# Altium PCB PCB2(ITERATION).PcbDoc
Units mil, origin at the board's own origin, x right, y up, seen from the top; angles counter-clockwise.
Board outline 7095 x 5260 mil, 4 copper layers (POWER, PGND, LOW POWER, SIGNAL/SGND); 86 components, 41 nets, 253 pads, 8 vias.
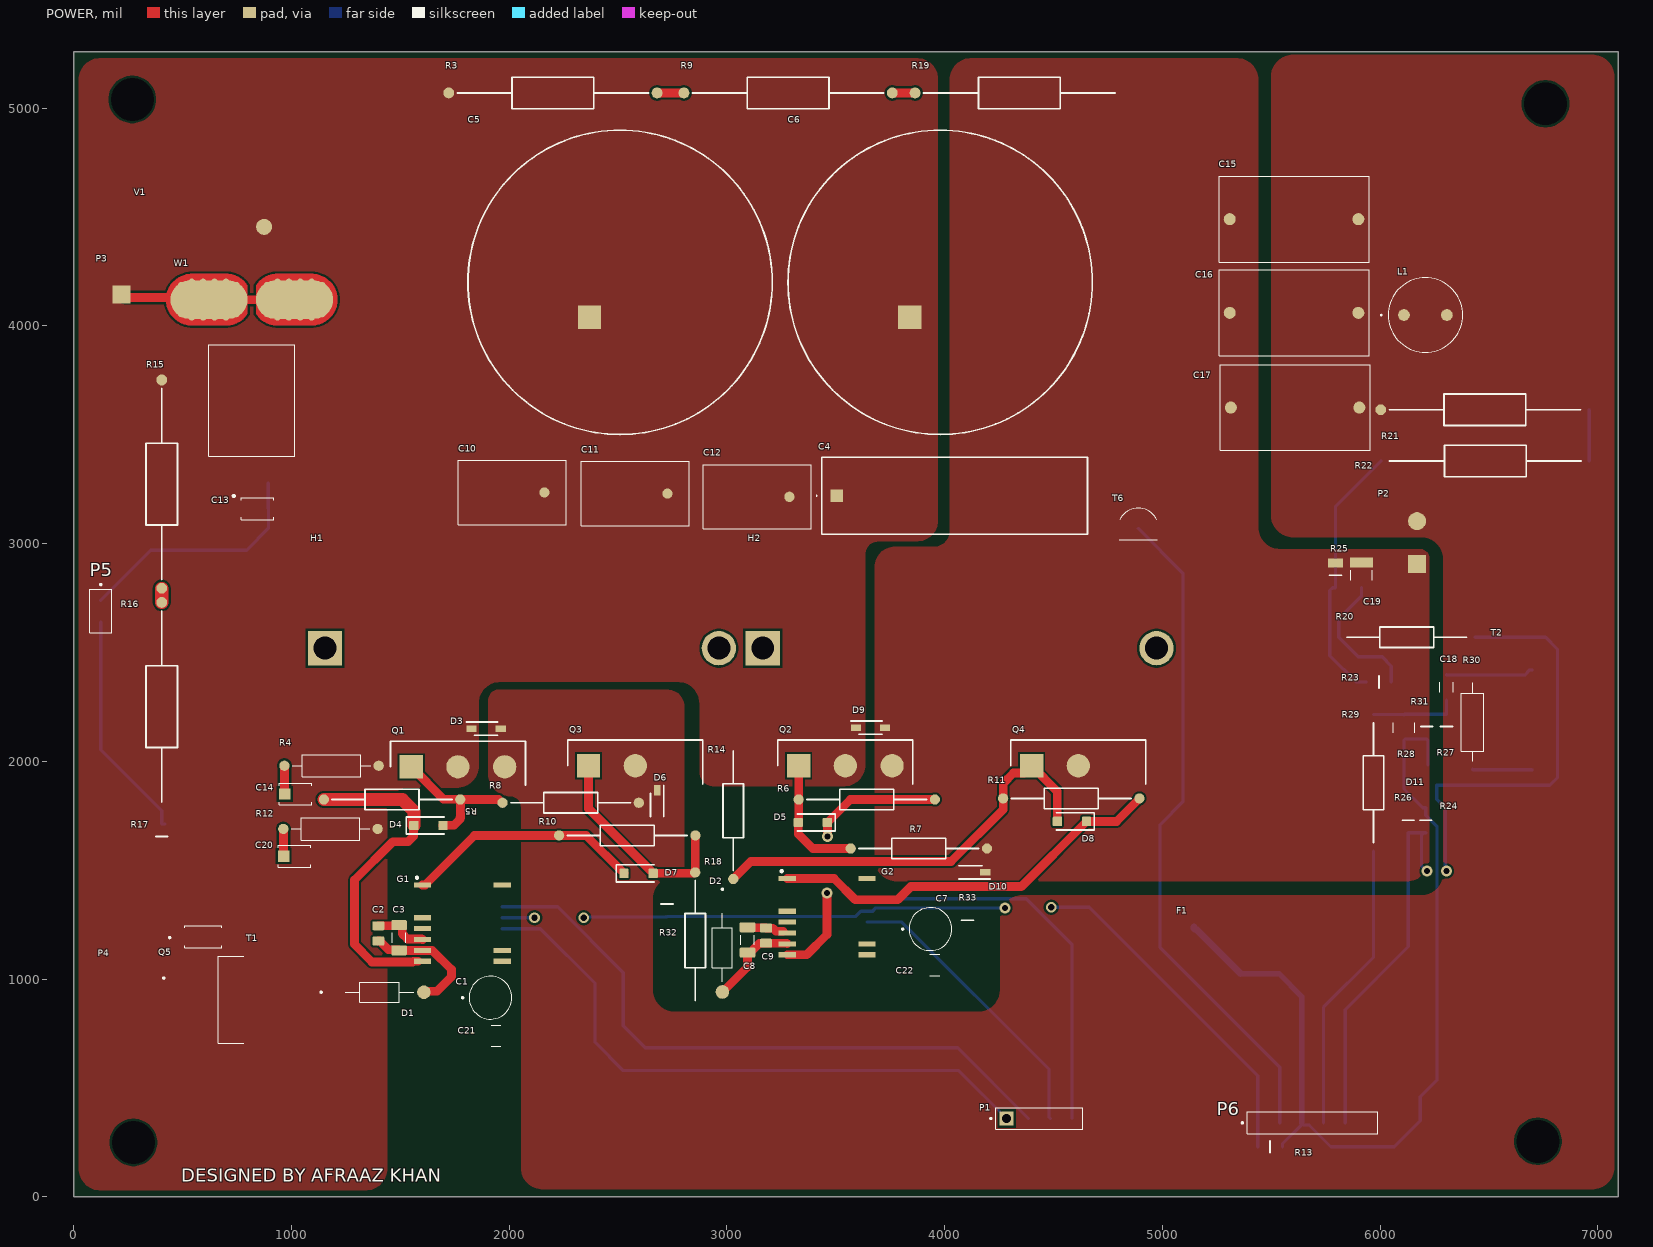
[diagram p0: POWER view]
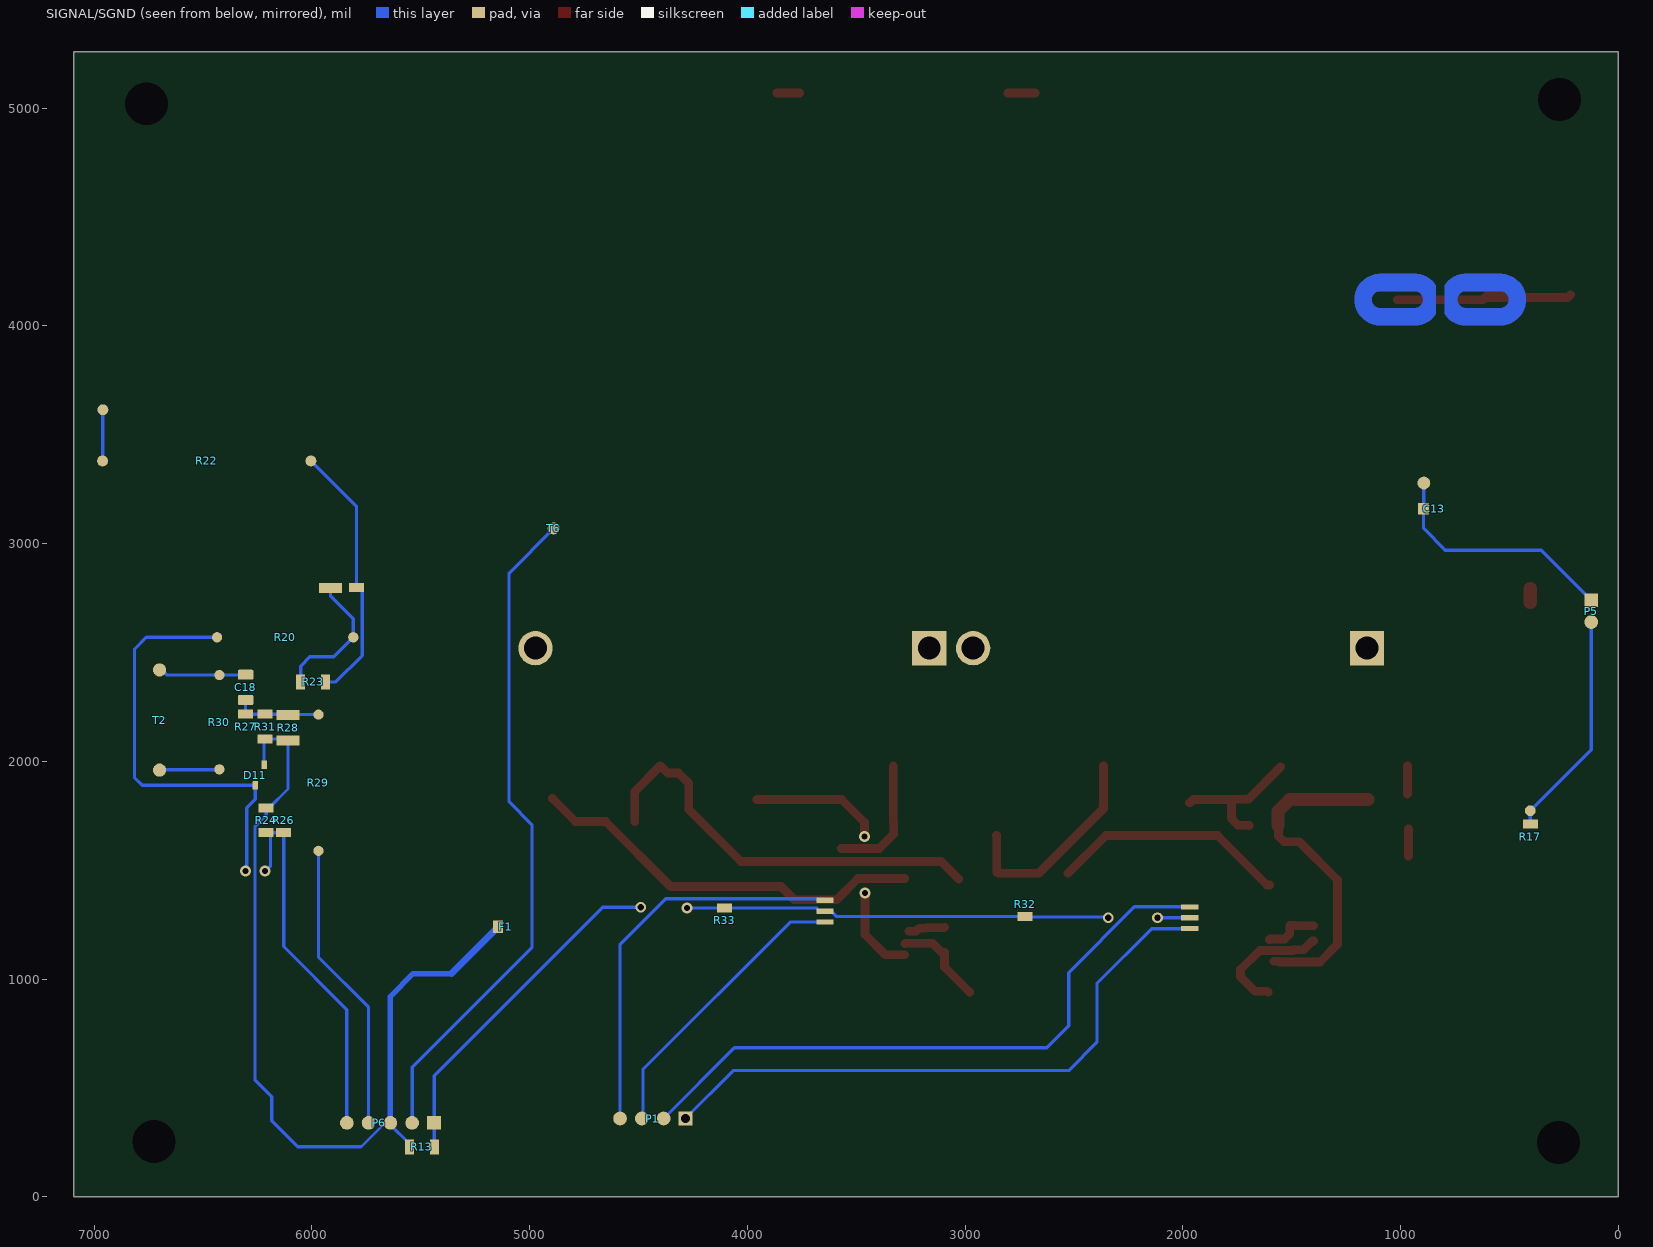
[diagram p1: SIGNAL/SGND view, seen from below]
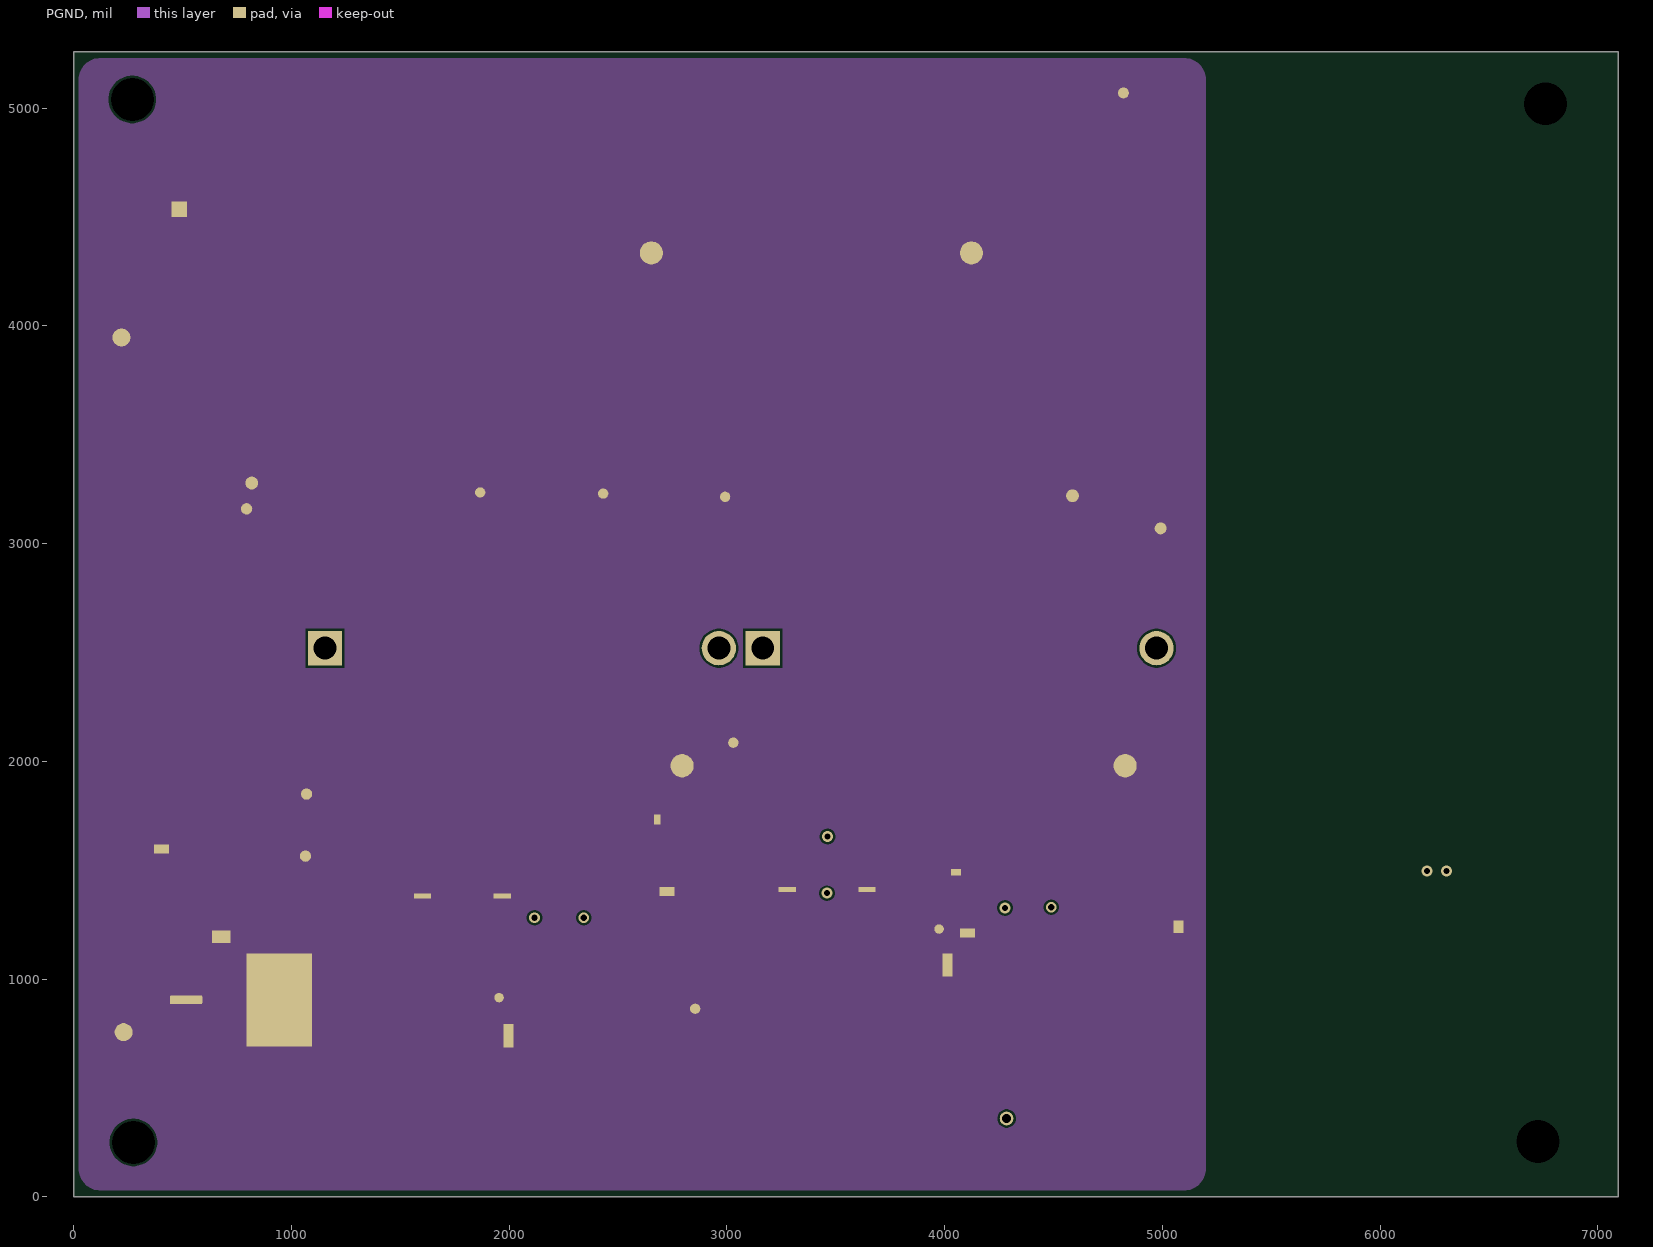
[diagram p2: PGND]
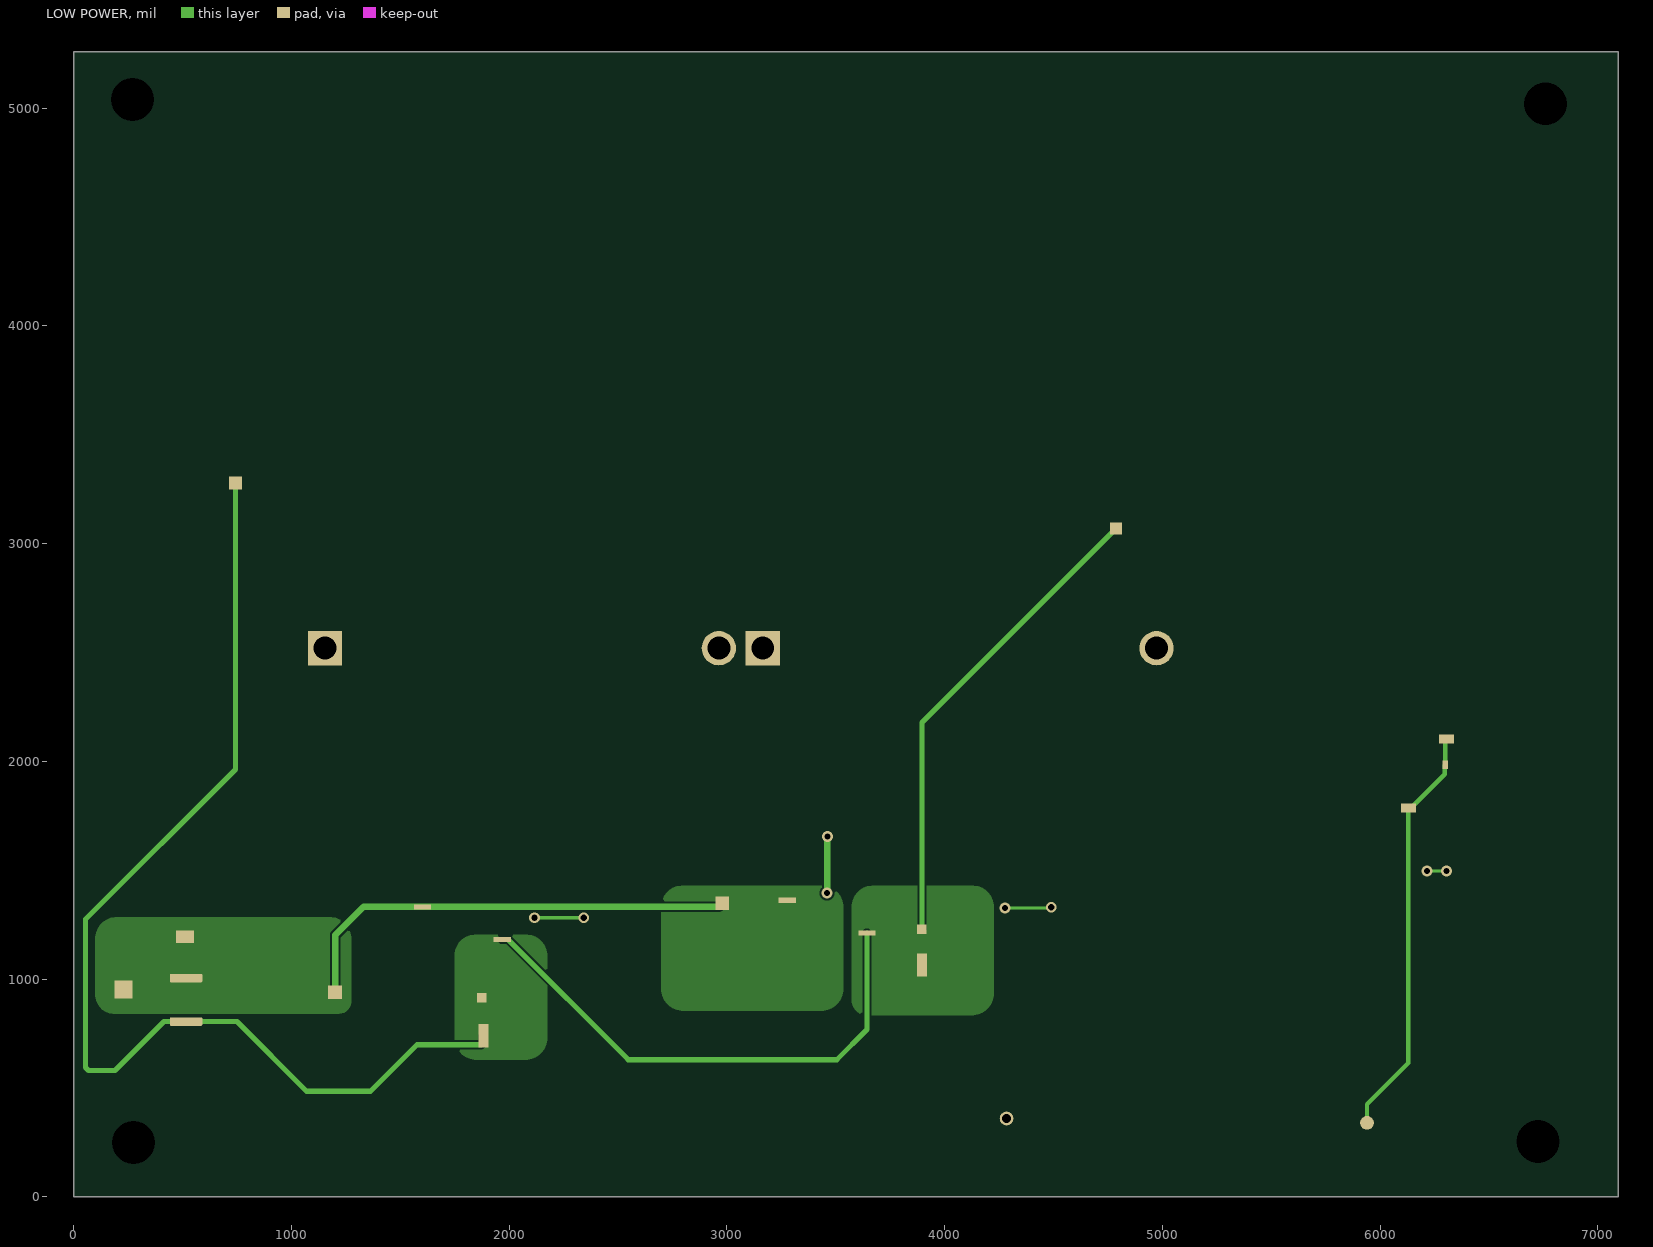
[diagram p3: LOW POWER]
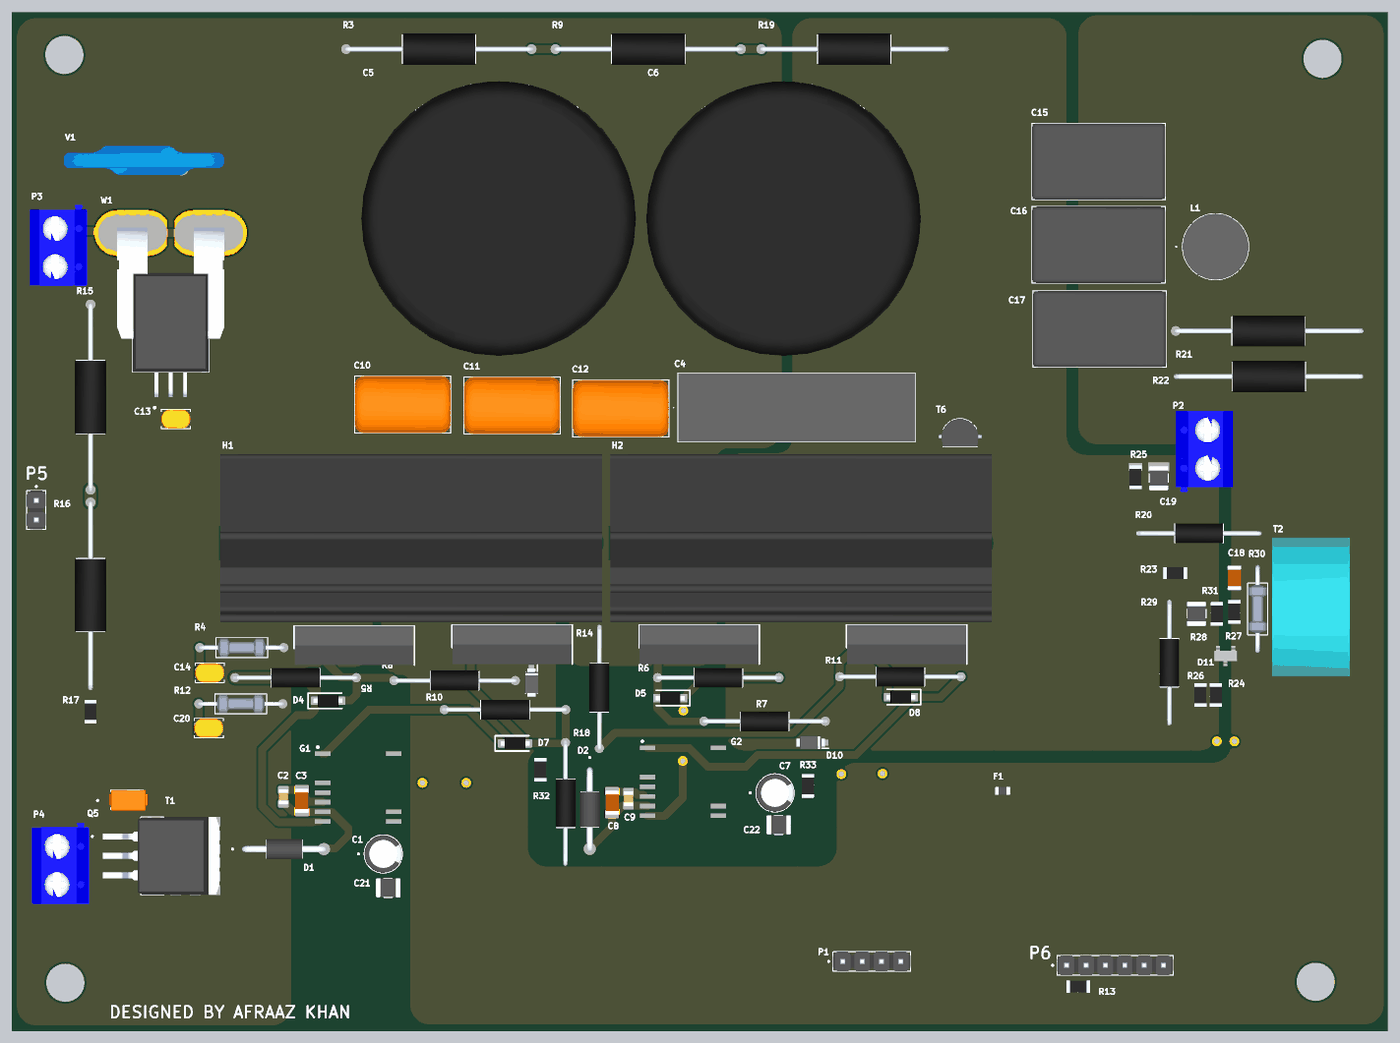
[diagram p4: 3D render of the assembled board from above, using the file's embedded part models]

## Layer stack, top to bottom
Top Solder: solder mask 0.4, Solder Resist, Dk 3.5
POWER: signal copper 1.4
Dielectric 1: dielectric 12.6, FR-4, Dk 4.8
PGND: signal copper 1.4
Dielectric3: dielectric 12.6, FR-4, Dk 4.8
LOW POWER: signal copper 1.4
Dielectric2: dielectric 12.6, FR-4, Dk 4.8
SIGNAL/SGND: signal copper 1.4
Bottom Solder: solder mask 0.4, Solder Resist, Dk 3.5

## Board outline
0,0 7095,0 7095,5260 0,5260

## Design rules (kind name [scope] priority, off if disabled: settings)
Clearance [All] p1: gap=10 ignorepadtopadclearanceinfootprint=FALSE
Height [All] p1: minheight=0 maxheight=2100 prefheight=500
HoleSize [All] p1: absolutevalues=TRUE maxlimit=200 minlimit=1 maxpercent=80.000 minpercent=20.000
PolygonConnect [All] p1: connectstyle=Direct reliefconductorwidth=10 reliefentries=4 polygonreliefangle="90 Angle" airgapwidth=10
RoutingVias [All] p1: holewidth=28 width=50 viastyle="Through Hole" minholewidth=28 minwidth=50 maxholewidth=28 maxwidth=50
SilkToSolderMaskClearance [IsPad] p1: minsilkscreentomaskgap=8 clearancetoexposedcopper=TRUE
SolderMaskExpansion [All] p1: expansion=0 istentingtop=FALSE
SupplyNets "Schematic Supply Nets_4" [InNet('+12')] p1: voltage=0.000
SupplyNets "Schematic Supply Nets_3" [InNet('+380V')] p2: voltage=0.000
SupplyNets "Schematic Supply Nets_2" [InNet('SGND')] p3: voltage=0.000
SupplyNets "Schematic Supply Nets_1" [InNet('+5')] p4: voltage=0.000
SupplyNets "Schematic Supply Nets" [InNet('PGND')] p5: voltage=0.000
Width [All] p1: maxlimit=80 minlimit=10 preferedwidth=32 toplayer_prefwidth=60 midlayer1_maxwidth=10 midlayer1_prefwidth=10 midlayer2_maxwidth=32 bottomlayer_maxwidth=32 bottomlayer_prefwidth=15 minimp=50.000000 maximp=50.000000 favimp=50.000000
27 further rules are at their usual default settings.

## Components (designator, comment, footprint, x,y, rotation, side; value= is the part's Value field where it differs from the comment)
C1 "22u" 22uF 1935,950 r0 top
C2 "1uF(New)" 1uF(New) 1400,1210 r270 top
C3 "1uF" 1uF#1 1500,1190 r270 top
C4 "1uF Film" 1.0uF/630V 4020,3240 r0 top
C5 "470uF/450V" "470 µF/450 V" 2470,4260 r0 top
C6 "470uF/450V" "470 µF/450 V" 3940,4260 r0 top
C7 "22u" 22uF 3955.63,1265 r0 top
C8 "1uF" 1uF#1 3100,1180 r270 top
C9 "1uF(New)" 1uF(New) 3180,1200 r270 top
C10 "33nF" 33nF 2025,3215 r180 top
C11 "33nF" 33nF 2590,3210 r180 top
C12 "33nF" 33nF 3150,3195 r180 top
C13 "1nF" 1nF#1 845,3155 r180 top
C14 "1nF" 1nF#2 1020,1855 r0 top
C15 "2.2uF" 2.2uF 5585,4485 r180 top
C16 "2.2uF" 2.2uF 5585,4055 r180 top
C17 "2.2uF" 2.2uF 5590,3620 r180 top
C18 "1uF" 1uF#2 6310,2340 r270 top
C19 "100nF/100V" 100nF/100V#1 5915,2850 r90 top
C20 "1nF" 1nF#2 1015,1570 r0 top
C21 "100nF/100V" 100nF/100V#2 1935,740 r0 top
C22 "100nF/100V" 100nF/100V#2 3950,1065 r0 top
D1 "Rectifier" Rectifier 1405,935 r0 top
D2 "Rectifier" Rectifier 2975,1145 r270 top
D3 "Fast Switching Diode" "Fast Switching Diode"#1 1890,2155 r0 top
D4 "Zener Diode" "Zener Diode" 1620,1710 r0 top
D5 "Zener Diode" "Zener Diode" 3405,1715 r180 top
D6 "Fast Switching Diode" "Fast Switching Diode"#2 2685,1805 r270 top
D7 "Zener Diode" "Zener Diode" 2585,1490 r0 top
D8 "Zener Diode" "Zener Diode" 4595,1720 r180 top
D9 "Fast Switching Diode" "Fast Switching Diode"#1 3655,2160 r0 top
D10 "Fast Switching Diode" "Fast Switching Diode"#2 4125,1485 r180 top
D11 "Dual Diode" "Dual Diode" 6255.04,1937.2 r270 top
F1 "Ferrite Bead" "Ferrite Bead" 5105,1240 r180 top
G1 "Gate driver" "Gate Driver" 1785,1250 r0 top
G2 "Gate driver" "Gate Driver" 3460,1280 r0 top
H1 "Heatsink" Heatsink 2090,2560 r0 top
H2 "Heatsink" Heatsink 4100,2560 r0 top
L1 "2.2mH" 2.2mH 6220,4055 r0 top
P1 "4 PIN STM" "4 PIN STM" 4440,365 r0 top
P2 "2 Pin Connector" "2 Pin Connector"#1 6155,3015 r90 top
P3 "2 Pin Connector" "2 Pin Connector"#2 235,4035 r270 top
P4 "2 Pin Connector" "2 Pin Connector"#3 245,845 r270 top
P5 "2 PIN STM" "2 PIN STM" 125,2680 r270 top
P6 "6 PIN STM" "6 PIN STM" 5695,335 r0 top
Q1 "Mosfet" Mosfet#1 1745.87,2000 r0 top
Q2 "Mosfet" Mosfet#1 3525,2005 r0 top
Q3 "Mosfet" Mosfet#2 2560.43,2005 r0 top
Q4 "Mosfet" Mosfet#2 4595,2005 r0 top
Q5 "12 TO 5" "12 TO 5" 793.62,910 r0 top
R3 "1M" 1M#1 2240,5075 r180 top
R4 "100" 100 1205,1985 r0 top
R5 "22" 22 1465,1820 r0 top
R6 "22" 22 3640.98,1830 r180 top
R7 "1K" 1K#1 3910,1605 r180 top
R8 "1K" 1K#1 2255,1805 r0 top
R9 "1M" 1M#1 3320,5075 r180 top
R10 "22" 22 2545,1655 r0 top
R11 "22" 22 4580,1835 r180 top
R12 "100" 100 1200,1695 r0 top
R13 "10k" 10K#1 5495,230 r180 top
R14 "1K" 1K#2 3025,1800.98 r270 top
R15 "1M" 1M#1 410,3235 r90 top
R16 "1M" 1M#2 410,2213.31 r90 top
R17 "10k" 10K#2 405,1655 r90 top
R18 "1K" 1K#3 2850,1205 r270 top
R19 "1M" 1M#3 4381.69,5075 r180 top
R20 "1K" 1K#4 6095,2565 r0 top
R21 "1M" 1M#2 6520,3620 r180 top
R22 "1M" 1M#4 6445,3375 r0 top
R23 "10k" 10K#1 5995,2365 r180 top
R24 "10k" 10K#1 6210,1730 r270 top
R25 "10k" 10K#3 5795,2855 r270 top
R26 "10k" 10K#4 6130,1730 r270 top
R27 "10k" 10K#5 6305,2160 r270 top
R28 "100nF/100V" 100nF/100V#3 6110,2160 r270 top
R29 "1K" 1K#4 5965,1930 r270 top
R30 "50" 50 6425,2150 r90 top
R31 "10k" 10K#1 6215,2160 r90 top
R32 "10k" 10K#2 2725,1345 r270 top
R33 "10k" 10K#2 4105,1270 r90 top
T1 "TVS" TVS 595,1200 r0 top
T2 "Current Transform" "Current Transformer" 6710,2190 r0 top
T6 "Temp Sensor" "Temp Sensor" 4890,3070 r0 top
V1 "MOV" MOV 660,4500 r0 top
W1 "Current sensor" "Current Sensor" 828.5,3744.45 r0 top

## Footprints (in the part's own frame and the unit in brackets; to place one, negate y for a bottom-side part, rotate by r counter-clockwise, add the part's x,y. Pads: shape width x height; smd on the part's side, far side on the other; paste and mask are expansions set on the pad)
1.0uF/630V [mm] "ECW-FE2J105QD"
  rect 1.5x1.5 smd: 1(-13.081,-0.508)
  round 1.5 on Mid1: 2(14.419,-0.508)
  silkscreen extent -15.48,-5.01 16.17,3.99, body extent -14.83,-5.01 16.17,3.99, height 19.6
1K#1 [mm]
  round 1.2 smd: 1(-7.239,0.127) 2(8.661,0.127)
  silkscreen extent -6.29,-1.07 7.71,1.33, body extent -7.54,-1.16 8.96,1.42, height 2.6
1K#2 [mm]
  round 1.2 on Mid1: 1(-7.239,0.127)
  round 1.2 smd: 2(8.661,0.127)
  silkscreen extent -6.29,-1.07 7.71,1.33, body extent -7.54,-1.16 8.96,1.42, height 2.6
1K#3 [mm]
  round 1.2 smd: 1(-7.239,0.127)
  round 1.2 on Mid1: 2(8.661,0.127)
  silkscreen extent -6.29,-1.07 7.71,1.33, body extent -7.54,-1.16 8.96,1.42, height 2.6
1K#4 [mm]
  round 1.2 smd far side: 1(-7.239,0.127) 2(8.661,0.127)
  silkscreen extent -6.29,-1.07 7.71,1.33, body extent -7.54,-1.16 8.96,1.42, height 2.6
1M#1 [mm]
  round 1.275 smd: 1(-11.176,0.127) 2(13.124,0.127)
  silkscreen extent -10.19,-1.71 12.14,1.97, body extent -11.5,-1.91 13.39,2.17, height 4.08
1M#2 [mm]
  round 1.275 smd far side: 1(-11.176,0.127)
  round 1.275 smd: 2(13.124,0.127)
  silkscreen extent -10.19,-1.71 12.14,1.97, body extent -11.5,-1.91 13.39,2.17, height 4.08
1M#3 [mm]
  round 1.275 on Mid1: 1(-11.176,0.127)
  round 1.275 smd: 2(13.124,0.127)
  silkscreen extent -10.19,-1.71 12.14,1.97, body extent -11.5,-1.91 13.39,2.17, height 4.08
1M#4 [mm]
  round 1.275 smd far side: 1(-11.176,0.127) 2(13.124,0.127)
  silkscreen extent -10.19,-1.71 12.14,1.97, body extent -11.5,-1.91 13.39,2.17, height 4.08
1nF#1 [mil]
  rect 51.89x51.89 smd far side mask+4.02: 1(-50,-5)
  round 51.89 on Mid1 mask+4.02: 2(50,-5)
  silkscreen extent -75,-55 75,45, body extent -75,-55 75,45, height 183
1nF#2 [mil]
  rect 51.89x51.89 smd mask+4.02: 1(-50,-5)
  round 51.89 on Mid1 mask+4.02: 2(50,-5)
  silkscreen extent -75,-55 75,45, body extent -75,-55 75,45, height 183
1uF#1 [mm] "C1206C105K1RACTU"
  rrect25% 1.16x1.82 smd paste+0 mask+0.102: 1(-1.475,-0.127) 2(1.475,-0.127)
  silkscreen extent -0.58,-0.93 0.58,0.67, body extent -1.6,-1.02 1.6,0.78, height 1.59
1uF#2 [mm] "C1206C105K1RACTU"
  rrect25% 1.16x1.82 smd far side paste+0 mask+0.102: 1(-1.475,-0.127) 2(1.475,-0.127)
  silkscreen extent -0.58,-0.93 0.58,0.67, body extent -1.6,-1.02 1.6,0.78, height 1.59
1uF(New) [mm]
  rrect25% 1.05x1.38 smd: 1(-0.888,0) 2(0.888,0)
  body extent -1,-0.63 1,0.63, height 1.35
"2 Pin Connector"#1 [mm] "KF301-2P"
  rect 2.1x2.1 smd: 1(-2.754,-0.381)
  round 2.1 smd: 2(2.246,-0.381)
  body extent -5.85,-3.62 4.75,3.88, height 10
"2 Pin Connector"#2 [mm] "KF301-2P"
  rect 2.1x2.1 smd: 1(-2.754,-0.381)
  round 2.1 on Mid1: 2(2.246,-0.381)
  body extent -5.85,-3.62 4.75,3.88, height 10
"2 Pin Connector"#3 [mm] "KF301-2P"
  rect 2.1x2.1 on Mid2: 1(-2.754,-0.381)
  round 2.1 on Mid1: 2(2.246,-0.381)
  body extent -5.85,-3.62 4.75,3.88, height 10
"2 PIN STM" [mm]
  rect 1.605x1.605 smd far side: 1(-1.524,0)
  round 1.605 smd far side: 2(1.016,0)
  silkscreen extent -3.45,-1.27 2.29,1.27, body extent -2.79,-1.27 2.29,1.27, height 8.74
2.2mH [mil]
  round 54.37 smd: 1(-110,-5) 2(86.85,-5)
  silkscreen extent -216,-176 160,166, body extent -183,-176 160,166, height 516
2.2uF [mm]
  round 1.4 smd: 1(-8.008,-0.127) 2(6.992,-0.127)
  silkscreen extent -9.26,-5.13 8.24,4.87, body extent -9.26,-5.13 8.24,4.87, height 15.5
"4 PIN STM" [mm]
  rect 1.605x1.605 / inner round 1.605 / far side rect 1.605x1.605 hole 1.07: 1(-3.937,-0.127)
  round 1.605 smd far side: 2(-1.397,-0.127) 3(1.143,-0.127) 4(3.683,-0.127)
  silkscreen extent -5.87,-1.4 4.95,1.14, body extent -5.21,-1.4 4.95,1.14, height 8.74
"6 PIN STM" [mil]
  rect 63.19x63.19 smd far side: 1(-255,5)
  round 63.19 smd far side: 2(-155,5) 3(-55,5) 4(45,5) 5(145,5)
  round 63.19 on Mid2: 6(245,5)
  silkscreen extent -331,-45 295,55, body extent -305,-45 295,55, height 344
10K#1 [mm] "RC1206FR-0710KL"
  rect 1.05x1.75 smd far side: 1(-1.45,0) 2(1.45,0)
  silkscreen extent 0,-0.7 0,0.7, body extent -1.68,-0.8 1.42,0.8, height 0.65
10K#2 [mm] "RC1206FR-0710KL"
  rect 1.05x1.75 on Mid1: 1(-1.45,0)
  rect 1.05x1.75 smd far side: 2(1.45,0)
  silkscreen extent 0,-0.7 0,0.7, body extent -1.68,-0.8 1.42,0.8, height 0.65
10K#3 [mm] "RC1206FR-0710KL"
  rect 1.05x1.75 smd: 1(-1.45,0)
  rect 1.05x1.75 smd far side: 2(1.45,0)
  silkscreen extent 0,-0.7 0,0.7, body extent -1.68,-0.8 1.42,0.8, height 0.65
10K#4 [mm] "RC1206FR-0710KL"
  rect 1.05x1.75 on Mid2: 1(-1.45,0)
  rect 1.05x1.75 smd far side: 2(1.45,0)
  silkscreen extent 0,-0.7 0,0.7, body extent -1.68,-0.8 1.42,0.8, height 0.65
10K#5 [mm] "RC1206FR-0710KL"
  rect 1.05x1.75 smd far side: 1(-1.45,0)
  rect 1.05x1.75 on Mid2: 2(1.45,0)
  silkscreen extent 0,-0.7 0,0.7, body extent -1.68,-0.8 1.42,0.8, height 0.65
"12 TO 5" [mm]
  rrect25% 3.79x0.99 on Mid2: 1(-7.035,2.413) 3(-7.035,-2.667)
  rrect25% 3.79x0.99 on Mid1: 2(-7.035,-0.127)
  rect 7.62x10.84 on Mid1 paste-6: 4(3.845,-0.127)
  silkscreen extent -9.73,-5.21 -0.29,4.95, body extent -8.25,-5.21 6.98,4.95, height 4.83
22 [mm]
  round 1.2 smd: 1(-8.001,0.127) 2(7.899,0.127)
  silkscreen extent -7.05,-1.07 6.95,1.33, body extent -8.3,-1.16 8.2,1.42, height 2.6
22uF [mm]
  round 1.1 on Mid1: N(0.492,-0.889)
  rect 1.1x1.1 on Mid2: P(-1.508,-0.889)
  silkscreen extent -3.86,-3.39 1.99,1.61, body extent -3.01,-3.39 1.99,1.61, height 11
33nF [mm]
  round 1.2 smd: 1(-3.496,-0.508)
  round 1.2 on Mid1: 2(4.004,-0.508)
  silkscreen extent -6.05,-4.26 6.55,3.24, body extent -6.05,-4.26 6.55,3.24, height 15.5
50 [mm]
  round 1.2 smd far side: 1(-4.738,0) 2(6.262,0)
  silkscreen extent -3.82,-1.3 5.34,1.3, body extent -5.01,-1.2 6.54,1.2, height 2.4
100 [mm]
  round 1.2 smd: 1(-6.008,-0.127) 2(4.992,-0.127)
  silkscreen extent -5.09,-1.43 4.07,1.17, body extent -6.28,-1.33 5.27,1.07, height 2.4
100nF/100V#1 [mm] "C1210C104K1RACAUTO"
  rect 1.16x2.72 smd far side: 1(-1.348,0)
  rect 1.16x2.72 smd: 2(1.602,0)
  silkscreen extent -0.44,-1.25 0.7,1.25, body extent -1.47,-1.25 1.73,1.25, height 2.7
100nF/100V#2 [mm] "C1210C104K1RACAUTO"
  rect 1.16x2.72 on Mid2: 1(-1.348,0)
  rect 1.16x2.72 on Mid1: 2(1.602,0)
  silkscreen extent -0.44,-1.25 0.7,1.25, body extent -1.47,-1.25 1.73,1.25, height 2.7
100nF/100V#3 [mm] "C1210C104K1RACAUTO"
  rect 1.16x2.72 smd far side: 1(-1.348,0) 2(1.602,0)
  silkscreen extent -0.44,-1.25 0.7,1.25, body extent -1.47,-1.25 1.73,1.25, height 2.7
"470 µF/450 V" [mm] "ELG477M450AT6AA"
  rect 2.7x2.7 smd: 1(-2.54,-5.588)
  round 2.7 on Mid1: 2(4.666,1.905)
  silkscreen extent -16.73,-19.27 18.77,16.23, body extent -16.98,-19.65 19.02,16.35, height 53.34
"Current Sensor" [mm]
  rect 1.5x1.5 on Mid2: 1(-2.164,-11.843)
  round 1.5 on Mid1: 2(-0.254,-11.843)
  round 1.5 smd far side: 3(1.656,-11.843)
  oval 9x4.5 smd mask+0: 4(4.746,9.557) 5(-5.254,9.557)
  round 0.8 smd: 4_1(2.746,7.507) 4_2(4.076,7.507) 4_3(5.406,7.507) 4_4(6.736,7.507) 4_5(7.951,7.899) 4_6(8.696,8.924) 4_7(8.696,10.19) 4_8(7.951,11.215) 4_9(6.736,11.607) 4_10(5.406,11.607) 4_11(4.076,11.607) 4_12(2.746,11.607) 4_13(1.541,11.215) 4_14(0.796,10.19) 4_15(0.796,8.924) 4_16(1.541,7.899) 5_1(-7.254,7.507) 5_2(-5.924,7.507) 5_3(-4.594,7.507) 5_4(-3.264,7.507) 5_5(-8.459,7.899) 5_6(-9.204,10.19) 5_7(-9.204,8.924) 5_8(-8.459,11.215) 5_9(-7.254,11.607) 5_10(-5.924,11.607) 5_11(-4.594,11.607) 5_12(-3.264,11.607) 5_13(-2.049,11.215) 5_14(-1.304,10.19) 5_15(-1.304,8.924) 5_16(-2.049,7.899)
  POWER region: 4.746,10.557 2.746,10.557 2.694,10.556 2.641,10.552 2.59,10.545 2.538,10.535 2.487,10.523 2.437,10.508 2.388,10.491 2.339,10.471 2.292,10.448 2.246,10.423 2.201,10.396 2.158,10.366 2.117,10.334 2.077,10.3 2.039,10.264 2.003,10.226 1.969,10.186 1.937,10.145 1.907,10.102 1.88,10.057 1.855,10.011 1.832,9.964 1.812,9.915 1.795,9.866 1.78,9.816 1.768,9.765 1.758,9.713 1.751,9.662 1.747,9.609 1.746,9.557 1.747,9.505 1.751,9.452 1.758,9.401 1.768,9.349 1.78,9.298 1.795,9.248 1.812,9.199 1.832,9.15 1.855,9.103 1.88,9.057 1.907,9.012 1.937,8.969 1.969,8.928 2.003,8.888 2.039,8.85 2.077,8.814 2.117,8.78 2.158,8.748 2.201,8.718 2.246,8.691 2.292,8.666 2.339,8.643 2.388,8.623 2.437,8.606 2.487,8.591 2.538,8.579 2.59,8.569 2.641,8.562 2.694,8.558 2.746,8.557 4.746,8.557 4.746,6.557 2.657,6.557 2.558,6.56 2.46,6.567 2.362,6.577 2.264,6.59 2.167,6.607 2.07,6.626 1.974,6.649 1.879,6.676 1.785,6.705 1.691,6.738 1.599,6.774 1.509,6.812 1.419,6.854 1.331,6.899 1.245,6.947 1.16,6.998 1.077,7.051 0.996,7.107 0.917,7.166 0.84,7.228 0.765,7.292 0.692,7.359 0.622,7.428 0.554,7.499 0.488,7.573 0.425,7.649 0.364,7.727 0.306,7.807 0.246,7.897 0.246,11.217 0.306,11.307 0.364,11.387 0.425,11.465 0.488,11.541 0.554,11.615 0.622,11.686 0.692,11.755 0.765,11.822 0.84,11.886 0.917,11.948 0.996,12.007 1.077,12.063 1.16,12.116 1.245,12.167 1.331,12.215 1.419,12.26 1.509,12.302 1.599,12.34 1.691,12.376 1.785,12.409 1.879,12.438 1.974,12.465 2.07,12.488 2.167,12.507 2.264,12.524 2.362,12.537 2.46,12.547 2.558,12.554 2.657,12.557 4.746,12.557
  POWER region: 6.903,12.553 7.06,12.541 7.215,12.52 7.37,12.491 7.522,12.455 7.673,12.41 7.821,12.358 7.966,12.298 8.108,12.23 8.246,12.155 8.38,12.073 8.509,11.984 8.634,11.888 8.753,11.786 8.867,11.678 8.975,11.564 9.077,11.445 9.173,11.32 9.262,11.191 9.344,11.057 9.419,10.919 9.487,10.777 9.547,10.632 9.599,10.484 9.644,10.333 9.68,10.181 9.709,10.026 9.73,9.871 9.742,9.714 9.746,9.557 9.742,9.4 9.73,9.243 9.709,9.088 9.68,8.933 9.644,8.781 9.599,8.63 9.547,8.482 9.487,8.337 9.419,8.195 9.344,8.057 9.262,7.923 9.173,7.794 9.077,7.669 8.975,7.55 8.867,7.436 8.753,7.328 8.634,7.226 8.509,7.13 8.38,7.041 8.246,6.959 8.108,6.884 7.966,6.816 7.821,6.756 7.673,6.704 7.522,6.659 7.37,6.623 7.215,6.594 7.06,6.573 6.903,6.561 6.746,6.557 4.746,6.557 4.746,8.557 6.746,8.557 6.798,8.558 6.851,8.562 6.902,8.569 6.954,8.579 7.005,8.591 7.055,8.606 7.104,8.623 7.153,8.643 7.2,8.666 7.246,8.691 7.291,8.718 7.334,8.748 7.375,8.78 7.415,8.814 7.453,8.85 7.489,8.888 7.523,8.928 7.555,8.969 7.585,9.012 7.612,9.057 7.637,9.103 7.66,9.15 7.68,9.199 7.697,9.248 7.712,9.298 7.724,9.349 7.734,9.401 7.741,9.452 7.745,9.505 7.746,9.557 7.745,9.609 7.741,9.662 7.734,9.713 7.724,9.765 7.712,9.816 7.697,9.866 7.68,9.915 7.66,9.964 7.637,10.011 7.612,10.057 7.585,10.102 7.555,10.145 7.523,10.186 7.489,10.226 7.453,10.264 7.415,10.3 7.375,10.334 7.334,10.366 7.291,10.396 7.246,10.423 7.2,10.448 7.153,10.471 7.104,10.491 7.055,10.508 7.005,10.523 6.954,10.535 6.902,10.545 6.851,10.552 6.798,10.556 6.746,10.557 4.746,10.557 4.746,12.557 6.746,12.557
  POWER region: -3.066,12.554 -2.968,12.547 -2.87,12.537 -2.772,12.524 -2.675,12.507 -2.578,12.488 -2.482,12.465 -2.387,12.438 -2.293,12.409 -2.199,12.376 -2.107,12.34 -2.017,12.302 -1.927,12.26 -1.839,12.215 -1.753,12.167 -1.668,12.116 -1.585,12.063 -1.504,12.007 -1.425,11.948 -1.348,11.886 -1.273,11.822 -1.2,11.755 -1.13,11.686 -1.062,11.615 -0.996,11.541 -0.933,11.465 -0.872,11.387 -0.814,11.307 -0.754,11.217 -0.754,7.897 -0.814,7.807 -0.872,7.727 -0.933,7.649 -0.996,7.573 -1.062,7.499 -1.13,7.428 -1.2,7.359 -1.273,7.292 -1.348,7.228 -1.425,7.166 -1.504,7.107 -1.585,7.051 -1.668,6.998 -1.753,6.947 -1.839,6.899 -1.927,6.854 -2.017,6.812 -2.107,6.774 -2.199,6.738 -2.293,6.705 -2.387,6.676 -2.482,6.649 -2.578,6.626 -2.675,6.607 -2.772,6.59 -2.87,6.577 -2.968,6.567 -3.066,6.56 -3.165,6.557 -5.254,6.557 -5.254,8.557 -3.254,8.557 -3.202,8.558 -3.149,8.562 -3.098,8.569 -3.046,8.579 -2.995,8.591 -2.945,8.606 -2.896,8.623 -2.847,8.643 -2.8,8.666 -2.754,8.691 -2.709,8.718 -2.666,8.748 -2.625,8.78 -2.585,8.814 -2.547,8.85 -2.511,8.888 -2.477,8.928 -2.445,8.969 -2.415,9.012 -2.388,9.057 -2.363,9.103 -2.34,9.15 -2.32,9.199 -2.303,9.248 -2.288,9.298 -2.276,9.349 -2.266,9.401 -2.259,9.452 -2.255,9.505 -2.254,9.557 -2.255,9.609 -2.259,9.662 -2.266,9.713 -2.276,9.765 -2.288,9.816 -2.303,9.866 -2.32,9.915 -2.34,9.964 -2.363,10.011 -2.388,10.057 -2.415,10.102 -2.445,10.145 -2.477,10.186 -2.511,10.226 -2.547,10.264 -2.585,10.3 -2.625,10.334 -2.666,10.366 -2.709,10.396 -2.754,10.423 -2.8,10.448 -2.847,10.471 -2.896,10.491 -2.945,10.508 -2.995,10.523 -3.046,10.535 -3.098,10.545 -3.149,10.552 -3.202,10.556 -3.254,10.557 -5.254,10.557 -5.254,12.557 -3.165,12.557
  POWER region: -5.254,10.557 -7.254,10.557 -7.306,10.556 -7.359,10.552 -7.41,10.545 -7.462,10.535 -7.513,10.523 -7.563,10.508 -7.612,10.491 -7.661,10.471 -7.708,10.448 -7.754,10.423 -7.799,10.396 -7.842,10.366 -7.883,10.334 -7.923,10.3 -7.961,10.264 -7.997,10.226 -8.031,10.186 -8.063,10.145 -8.093,10.102 -8.12,10.057 -8.145,10.011 -8.168,9.964 -8.188,9.915 -8.205,9.866 -8.22,9.816 -8.232,9.765 -8.242,9.713 -8.249,9.662 -8.253,9.609 -8.254,9.557 -8.253,9.505 -8.249,9.452 -8.242,9.401 -8.232,9.349 -8.22,9.298 -8.205,9.248 -8.188,9.199 -8.168,9.15 -8.145,9.103 -8.12,9.057 -8.093,9.012 -8.063,8.969 -8.031,8.928 -7.997,8.888 -7.961,8.85 -7.923,8.814 -7.883,8.78 -7.842,8.748 -7.799,8.718 -7.754,8.691 -7.708,8.666 -7.661,8.643 -7.612,8.623 -7.563,8.606 -7.513,8.591 -7.462,8.579 -7.41,8.569 -7.359,8.562 -7.306,8.558 -7.254,8.557 -5.254,8.557 -5.254,6.557 -7.254,6.557 -7.411,6.561 -7.568,6.573 -7.723,6.594 -7.878,6.623 -8.03,6.659 -8.181,6.704 -8.329,6.756 -8.474,6.816 -8.616,6.884 -8.754,6.959 -8.888,7.041 -9.017,7.13 -9.142,7.226 -9.261,7.328 -9.375,7.436 -9.483,7.55 -9.585,7.669 -9.681,7.794 -9.77,7.923 -9.852,8.057 -9.927,8.195 -9.995,8.337 -10.055,8.482 -10.107,8.63 -10.152,8.781 -10.188,8.933 -10.217,9.088 -10.238,9.243 -10.25,9.4 -10.254,9.557 -10.25,9.714 -10.238,9.871 -10.217,10.026 -10.188,10.181 -10.152,10.333 -10.107,10.484 -10.055,10.632 -9.995,10.777 -9.927,10.919 -9.852,11.057 -9.77,11.191 -9.681,11.32 -9.585,11.445 -9.483,11.564 -9.375,11.678 -9.261,11.786 -9.142,11.888 -9.017,11.984 -8.888,12.073 -8.754,12.155 -8.616,12.23 -8.474,12.298 -8.329,12.358 -8.181,12.41 -8.03,12.455 -7.878,12.491 -7.723,12.52 -7.568,12.541 -7.411,12.553 -7.254,12.557 -5.254,12.557
  SIGNAL/SGND region: 4.746,10.557 2.746,10.557 2.694,10.556 2.641,10.552 2.59,10.545 2.538,10.535 2.487,10.523 2.437,10.508 2.388,10.491 2.339,10.471 2.292,10.448 2.246,10.423 2.201,10.396 2.158,10.366 2.117,10.334 2.077,10.3 2.039,10.264 2.003,10.226 1.969,10.186 1.937,10.145 1.907,10.102 1.88,10.057 1.855,10.011 1.832,9.964 1.812,9.915 1.795,9.866 1.78,9.816 1.768,9.765 1.758,9.713 1.751,9.662 1.747,9.609 1.746,9.557 1.747,9.505 1.751,9.452 1.758,9.401 1.768,9.349 1.78,9.298 1.795,9.248 1.812,9.199 1.832,9.15 1.855,9.103 1.88,9.057 1.907,9.012 1.937,8.969 1.969,8.928 2.003,8.888 2.039,8.85 2.077,8.814 2.117,8.78 2.158,8.748 2.201,8.718 2.246,8.691 2.292,8.666 2.339,8.643 2.388,8.623 2.437,8.606 2.487,8.591 2.538,8.579 2.59,8.569 2.641,8.562 2.694,8.558 2.746,8.557 4.746,8.557 4.746,6.557 2.657,6.557 2.558,6.56 2.46,6.567 2.362,6.577 2.264,6.59 2.167,6.607 2.07,6.626 1.974,6.649 1.879,6.676 1.785,6.705 1.691,6.738 1.599,6.774 1.509,6.812 1.419,6.854 1.331,6.899 1.245,6.947 1.16,6.998 1.077,7.051 0.996,7.107 0.917,7.166 0.84,7.228 0.765,7.292 0.692,7.359 0.622,7.428 0.554,7.499 0.488,7.573 0.425,7.649 0.364,7.727 0.306,7.807 0.246,7.897 0.246,11.217 0.306,11.307 0.364,11.387 0.425,11.465 0.488,11.541 0.554,11.615 0.622,11.686 0.692,11.755 0.765,11.822 0.84,11.886 0.917,11.948 0.996,12.007 1.077,12.063 1.16,12.116 1.245,12.167 1.331,12.215 1.419,12.26 1.509,12.302 1.599,12.34 1.691,12.376 1.785,12.409 1.879,12.438 1.974,12.465 2.07,12.488 2.167,12.507 2.264,12.524 2.362,12.537 2.46,12.547 2.558,12.554 2.657,12.557 4.746,12.557
  SIGNAL/SGND region: 6.903,12.553 7.06,12.541 7.215,12.52 7.37,12.491 7.522,12.455 7.673,12.41 7.821,12.358 7.966,12.298 8.108,12.23 8.246,12.155 8.38,12.073 8.509,11.984 8.634,11.888 8.753,11.786 8.867,11.678 8.975,11.564 9.077,11.445 9.173,11.32 9.262,11.191 9.344,11.057 9.419,10.919 9.487,10.777 9.547,10.632 9.599,10.484 9.644,10.333 9.68,10.181 9.709,10.026 9.73,9.871 9.742,9.714 9.746,9.557 9.742,9.4 9.73,9.243 9.709,9.088 9.68,8.933 9.644,8.781 9.599,8.63 9.547,8.482 9.487,8.337 9.419,8.195 9.344,8.057 9.262,7.923 9.173,7.794 9.077,7.669 8.975,7.55 8.867,7.436 8.753,7.328 8.634,7.226 8.509,7.13 8.38,7.041 8.246,6.959 8.108,6.884 7.966,6.816 7.821,6.756 7.673,6.704 7.522,6.659 7.37,6.623 7.215,6.594 7.06,6.573 6.903,6.561 6.746,6.557 4.746,6.557 4.746,8.557 6.746,8.557 6.798,8.558 6.851,8.562 6.902,8.569 6.954,8.579 7.005,8.591 7.055,8.606 7.104,8.623 7.153,8.643 7.2,8.666 7.246,8.691 7.291,8.718 7.334,8.748 7.375,8.78 7.415,8.814 7.453,8.85 7.489,8.888 7.523,8.928 7.555,8.969 7.585,9.012 7.612,9.057 7.637,9.103 7.66,9.15 7.68,9.199 7.697,9.248 7.712,9.298 7.724,9.349 7.734,9.401 7.741,9.452 7.745,9.505 7.746,9.557 7.745,9.609 7.741,9.662 7.734,9.713 7.724,9.765 7.712,9.816 7.697,9.866 7.68,9.915 7.66,9.964 7.637,10.011 7.612,10.057 7.585,10.102 7.555,10.145 7.523,10.186 7.489,10.226 7.453,10.264 7.415,10.3 7.375,10.334 7.334,10.366 7.291,10.396 7.246,10.423 7.2,10.448 7.153,10.471 7.104,10.491 7.055,10.508 7.005,10.523 6.954,10.535 6.902,10.545 6.851,10.552 6.798,10.556 6.746,10.557 4.746,10.557 4.746,12.557 6.746,12.557
  SIGNAL/SGND region: -3.066,12.554 -2.968,12.547 -2.87,12.537 -2.772,12.524 -2.675,12.507 -2.578,12.488 -2.482,12.465 -2.387,12.438 -2.293,12.409 -2.199,12.376 -2.107,12.34 -2.017,12.302 -1.927,12.26 -1.839,12.215 -1.753,12.167 -1.668,12.116 -1.585,12.063 -1.504,12.007 -1.425,11.948 -1.348,11.886 -1.273,11.822 -1.2,11.755 -1.13,11.686 -1.062,11.615 -0.996,11.541 -0.933,11.465 -0.872,11.387 -0.814,11.307 -0.754,11.217 -0.754,7.897 -0.814,7.807 -0.872,7.727 -0.933,7.649 -0.996,7.573 -1.062,7.499 -1.13,7.428 -1.2,7.359 -1.273,7.292 -1.348,7.228 -1.425,7.166 -1.504,7.107 -1.585,7.051 -1.668,6.998 -1.753,6.947 -1.839,6.899 -1.927,6.854 -2.017,6.812 -2.107,6.774 -2.199,6.738 -2.293,6.705 -2.387,6.676 -2.482,6.649 -2.578,6.626 -2.675,6.607 -2.772,6.59 -2.87,6.577 -2.968,6.567 -3.066,6.56 -3.165,6.557 -5.254,6.557 -5.254,8.557 -3.254,8.557 -3.202,8.558 -3.149,8.562 -3.098,8.569 -3.046,8.579 -2.995,8.591 -2.945,8.606 -2.896,8.623 -2.847,8.643 -2.8,8.666 -2.754,8.691 -2.709,8.718 -2.666,8.748 -2.625,8.78 -2.585,8.814 -2.547,8.85 -2.511,8.888 -2.477,8.928 -2.445,8.969 -2.415,9.012 -2.388,9.057 -2.363,9.103 -2.34,9.15 -2.32,9.199 -2.303,9.248 -2.288,9.298 -2.276,9.349 -2.266,9.401 -2.259,9.452 -2.255,9.505 -2.254,9.557 -2.255,9.609 -2.259,9.662 -2.266,9.713 -2.276,9.765 -2.288,9.816 -2.303,9.866 -2.32,9.915 -2.34,9.964 -2.363,10.011 -2.388,10.057 -2.415,10.102 -2.445,10.145 -2.477,10.186 -2.511,10.226 -2.547,10.264 -2.585,10.3 -2.625,10.334 -2.666,10.366 -2.709,10.396 -2.754,10.423 -2.8,10.448 -2.847,10.471 -2.896,10.491 -2.945,10.508 -2.995,10.523 -3.046,10.535 -3.098,10.545 -3.149,10.552 -3.202,10.556 -3.254,10.557 -5.254,10.557 -5.254,12.557 -3.165,12.557
  SIGNAL/SGND region: -5.254,10.557 -7.254,10.557 -7.306,10.556 -7.359,10.552 -7.41,10.545 -7.462,10.535 -7.513,10.523 -7.563,10.508 -7.612,10.491 -7.661,10.471 -7.708,10.448 -7.754,10.423 -7.799,10.396 -7.842,10.366 -7.883,10.334 -7.923,10.3 -7.961,10.264 -7.997,10.226 -8.031,10.186 -8.063,10.145 -8.093,10.102 -8.12,10.057 -8.145,10.011 -8.168,9.964 -8.188,9.915 -8.205,9.866 -8.22,9.816 -8.232,9.765 -8.242,9.713 -8.249,9.662 -8.253,9.609 -8.254,9.557 -8.253,9.505 -8.249,9.452 -8.242,9.401 -8.232,9.349 -8.22,9.298 -8.205,9.248 -8.188,9.199 -8.168,9.15 -8.145,9.103 -8.12,9.057 -8.093,9.012 -8.063,8.969 -8.031,8.928 -7.997,8.888 -7.961,8.85 -7.923,8.814 -7.883,8.78 -7.842,8.748 -7.799,8.718 -7.754,8.691 -7.708,8.666 -7.661,8.643 -7.612,8.623 -7.563,8.606 -7.513,8.591 -7.462,8.579 -7.41,8.569 -7.359,8.562 -7.306,8.558 -7.254,8.557 -5.254,8.557 -5.254,6.557 -7.254,6.557 -7.411,6.561 -7.568,6.573 -7.723,6.594 -7.878,6.623 -8.03,6.659 -8.181,6.704 -8.329,6.756 -8.474,6.816 -8.616,6.884 -8.754,6.959 -8.888,7.041 -9.017,7.13 -9.142,7.226 -9.261,7.328 -9.375,7.436 -9.483,7.55 -9.585,7.669 -9.681,7.794 -9.77,7.923 -9.852,8.057 -9.927,8.195 -9.995,8.337 -10.055,8.482 -10.107,8.63 -10.152,8.781 -10.188,8.933 -10.217,9.088 -10.238,9.243 -10.25,9.4 -10.254,9.557 -10.25,9.714 -10.238,9.871 -10.217,10.026 -10.188,10.181 -10.152,10.333 -10.107,10.484 -10.055,10.632 -9.995,10.777 -9.927,10.919 -9.852,11.057 -9.77,11.191 -9.681,11.32 -9.585,11.445 -9.483,11.564 -9.375,11.678 -9.261,11.786 -9.142,11.888 -9.017,11.984 -8.888,12.073 -8.754,12.155 -8.616,12.23 -8.474,12.298 -8.329,12.358 -8.181,12.41 -8.03,12.455 -7.878,12.491 -7.723,12.52 -7.568,12.541 -7.411,12.553 -7.254,12.557 -5.254,12.557
  silkscreen extent -5.25,-13.46 4.75,4.31, body extent -7.25,-12.28 6.75,10.31, height 7.1
"Current Transformer" [mil]
  round 61 smd far side: S1(-10,230) S2(-10,-230)
  body extent -211,-358 191,358, height 764
"Dual Diode" [mm]
  rrect25% 1x0.65 on Mid2: 1(-1.201,1.146)
  rrect25% 1x0.65 smd far side: 2(-1.201,-0.894) 3(1.199,0.126)
  body extent -1.3,-1.39 1.3,1.65, height 1.3
"Fast Switching Diode"#1 [mm]
  rect 1.2x0.75 smd: 1(-1.573,-0.127) 2(1.827,-0.127)
  silkscreen extent -2.17,-0.9 1.48,0.65, body extent -1.72,-1.02 1.98,0.76, height 1
"Fast Switching Diode"#2 [mm]
  rect 1.2x0.75 smd: 1(-1.573,-0.127)
  rect 1.2x0.75 on Mid1: 2(1.827,-0.127)
  silkscreen extent -2.17,-0.9 1.48,0.65, body extent -1.72,-1.02 1.98,0.76, height 1
"Ferrite Bead" [mm]
  rect 1.14x1.47 smd far side: 1(-1.017,0)
  rect 1.14x1.47 on Mid1: 2(0.763,0)
  body extent -1.13,-0.54 0.87,0.51, height 1.23
"Gate Driver" [mm]
  rect 2x0.6 smd paste+0 mask+0: 1(-4.635,4.624) 4(-4.635,0.814) 5(-4.635,-0.456) 6(-4.635,-1.726) 7(-4.635,-2.996) 8(-4.635,-4.266) 9(4.665,-4.266) 10(4.665,-2.996) 16(4.665,4.624)
  rect 2x0.6 on Mid1 paste+0 mask+0: 2(-4.635,3.354) 15(4.665,3.354)
  rect 2x0.6 on Mid2 paste+0 mask+0: 3(-4.635,2.084) 11(4.665,-1.726)
  rect 2x0.6 smd far side paste+0 mask+0: 12(4.665,-0.456) 13(4.665,0.814) 14(4.665,2.084)
  silkscreen extent -5.41,5.35 -5.16,5.6, body extent -5.15,-4.97 5.18,5.33, height 2.65
Heatsink [mm] "694-50"
  rect 4.005x4.005 hole 2.67: 1(-23.749,-1.016)
  round 4.005 hole 2.67: 2(22.191,-1.016)
  body extent -25.76,-11.43 24.24,10.67, height 35.81
Mosfet#1 [mm]
  rect 2.715x2.715 smd: 1(-4.953,-0.635)
  round 2.715 smd: 2(0.497,-0.635) 3(5.947,-0.635)
  silkscreen extent -7.38,-2.79 8.37,2.36, body extent -7.3,-2.79 8.3,2.36, height 24.45
Mosfet#2 [mm]
  rect 2.715x2.715 smd: 1(-4.953,-0.635)
  round 2.715 smd: 2(0.497,-0.635)
  round 2.715 on Mid1: 3(5.947,-0.635)
  silkscreen extent -7.38,-2.79 8.37,2.36, body extent -7.3,-2.79 8.3,2.36, height 24.45
MOV [mm] "B72220S0421K101"
  rect 1.8x1.8 on Mid1: 1(-4.445,0.889)
  round 1.875 smd: 2(5.461,-1.143)
  body extent -9.99,-2.03 11.01,1.77, height 25.72
Rectifier [mm]
  rect 1.59x1.59 on Mid2: 1(-5.18,0.127)
  round 1.59 smd: 2(5.18,0.127)
  silkscreen extent -6.9,-1.05 4,1.3, body extent -5.57,-1.22 5.57,1.48, height 2.69
"Temp Sensor" [mm]
  rect 1.4x1.4 on Mid2 mask+0.05: 1(-2.6,0)
  round 1.4 smd far side mask+0.05: 2(0,0)
  round 1.4 on Mid1 mask+0.05: 3(2.6,0)
  silkscreen extent -2.23,-1.33 2.23,2.35, body extent -2.83,-1.33 2.83,2.35, height 9.34
TVS [mm]
  rect 2.12x1.5 on Mid1 paste+0 mask+0.102: A(2.115,-0.127)
  rect 2.12x1.5 on Mid2 paste+0 mask+0.102: C(-2.115,-0.127)
  silkscreen extent -4,-1.41 2.16,1.15, body extent -2.4,-1.52 2.65,1.18, height 2.19
"Zener Diode" [mm]
  rrect25% 1.1x1.1 smd: 1(-1.451,-0.11) 2(1.949,-0.11)
  silkscreen extent -2.35,-1.11 2.07,0.89, body extent -1.65,-0.91 2.15,0.69, height 1

## Part data
C1 C7: "EEU-FR1H220"
C2 C9: "CL21B105MBFNNNE"
C3 C8 C18: "C1206C105K1RACTU"
C4: "ECW-FE2J105QD"
C5 C6: "ELG477M450AT6AA"
C10 C11 C12: "ECW-FD2J333JB"
C13 C14 C20: "C315C102KAG5TA"
C15 C16 C17: "ECWFE2W225KA"
C19 C21 C22 R28: "C1210C104K1RACAUTO"
D1 D2: "MUR160G"
D3 D6 D9 D10: "1N4148W-7-F"
D4 D5 D7 D8: "BZT52C18"
D11: "BAT54C"
F1: "BLM21PG221SN1D"
G1 G2: "IR2110"
H1 H2: "694-50"
L1: "RLB0914-222KL"
P1: "M20-9990446"
P2 P3 P4: "KF301-2P"
P5: "M20-9990246"
P6: "M20-9990646"
Q1 Q2 Q3 Q4: "STW69N65M5"
Q5: "LM7805S"
R3 R9 R15 R16 R19 R21 R22: "PTF651M0000BYEA"
R4 R12: "CFR-25JB-52-100R"
R5 R6 R10 R11: "CFR-25JR-52-22R"
R7 R8 R14 R18 R20 R29: "MF0207FRE52-1K"
R13 R17 R23 R24 R25 R26 R27 R31 R32 R33: "RC1206FR-0710KL"
R30: "MF0207FTE52-49R9"
T1: "SMAJ15A"
T2: "ZMCT103C"
T6: "LM35DZ"
V1: "B72220S0421K101"
W1: "ACS758LCB-050B-PFF-T"

## Free pads (board coordinates)
  round 60 hole 196.85: 1(270,5040) 2(275,250) 3(6725,255) 4(6760,5020)

## Via types
v1: diameter 50, hole 28, POWER to SIGNAL/SGND, 8 vias

## Nets (pads, with @x,y where several pads share a name; then routed paths per layer and width w, separated by ;. In a path a pad name is that pad's centre, name@x,y a point inside that pad or via, vN(x,y) a via of type N, cw(c..) or ccw(c..) an arc to the next point about the centre after c; other vN are vias at no path point)
+3.3V: D11.1 P6.6 R26.1 R27.2 | length 1922.2
  LOW POWER w20: P6.6 5940,425 6130,615 R26.1 6143.78,1787.09 6297.36,1940.67 6297.36,1981.69 D11.1 6300.16,2098.07 R27.2
+5: C1.P C7.P C21.1 C22.1 G1.11 G2.11 Q5.3 T6.1 W1.1 | length 9765.1
  LOW POWER w24: W1.1 743.31,1963.31 55,1275 55,594.06 69.06,580 190,580 415,805 Q5.3 750,805 1070,485 1363.82,485 1577.28,698.46 1871.09,698.46 1881.93,709.29 C21.1 ; G1.11 1995.84,1182.05 2547.89,630 3505,630 3643.66,768.66 G2.11 ; C7.P 3896.26,2178.62 T6.1
+12: D1.1 D2.1 G1.3 G2.3 P4.1 Q5.1 T1.C | length 2101.3
  LOW POWER w30: D1.1 1201.06,1201.06 1332.05,1332.05 G1.3 2963.11,1332.05 D2.1
+380V: C4.1 C5.1 C6.1 C10.1 C11.1 C12.1 D3.1 D9.1 P3.1 Q1.2 Q2.2 R3.2 R4.2 R12.2 R15.2 V1.2 W1.4 W1.4_1 W1.4_2 W1.4_3 W1.4_4 W1.4_5 W1.4_6 W1.4_7 W1.4_8 W1.4_9 W1.4_10 W1.4_11 W1.4_12 W1.4_13 W1.4_14 W1.4_15 W1.4_16 W1.5 W1.5_1 W1.5_2 W1.5_3 W1.5_4 W1.5_5 W1.5_6 W1.5_7 W1.5_8 W1.5_9 W1.5_10 W1.5_11 W1.5_12 W1.5_13 W1.5_14 W1.5_15 W1.5_16 | length 968.9
  POWER w40: P3.1 233.43,4130 612.36,4130 W1.5 ; W1.5_6@466.16,4141.52 600.85,4141.52 W1.5 ; W1.4 W1.5
AC_LINE: C15.1 C16.1 C17.1 D3.2 D6.1 L1.1 L1.2 P2.2 Q1.3 Q3.2 R8.2 R21.2
AC_NEUTRAL: C15.2 C16.2 C17.2 C19.2 D9.2 D10.1 P2.1 Q2.3 Q4.2 R7.1 R25.1
COUT_FB: P6.4 R29.2 | length 1344.3
  SIGNAL/SGND w15: P6.4 5740,870 5970,1100 R29.2
CURRENT_FB: C13.1 P5.1 W1.3 | length 1115.4
  SIGNAL/SGND w15: P5.1 355,2970 795,2970 895,3070 C13.1 893.7,3161.3 W1.3
HIN_A: G1.12 P1.1 | length 2835.7
  SIGNAL/SGND w15: G1.12 2142.95,1232.05 2395,980 2395,710 2525,580 4065,580 P1.1
HIN_B: G2.12 P1.3 | length 1343.9
  SIGNAL/SGND w15: G2.12 3802.95,1262.05 4480,585 4480,365 P1.3
LIN_A: G1.14 P1.2 | length 2962.5
  SIGNAL/SGND w15: G1.14 2222.95,1332.05 2525,1030 2525,785 2625,685 4060,685 P1.2
LIN_B: G2.14 P1.4 | length 1831.3
  SIGNAL/SGND w15: G2.14 3647.97,1366.36 3681.09,1366.36 3684.32,1369.59 4375.41,1369.59 4585,1160 P1.4
NetC2_1: C2.1 C3.1 G1.6 | length 252.9
  POWER w40: C2.1 1478.9,1244.96 1482.01,1248.07 1507.17,1248.07 1510,1245.24 1510,1208.2 1533.43,1184.76 1599.8,1184.76 G1.6
NetC2_2: C2.2 C3.2 D1.2 G1.7 | length 579.7
  POWER w40: C2.2 1406.5,1175.04 1446.77,1134.76 1492.28,1134.76 1495.06,1131.99 G1.7 1648.01,1131.99 1735.93,1044.07 1735.93,1010.93 1669.32,944.32 1613.26,944.32 D1.2
NetC8_1: C8.1 C9.1 G2.6 | length 170.6
  POWER w40: C8.1 3097.44,1235.63 3179.33,1235.63 3180.67,1234.29 3211.67,1234.29 3225.96,1220 G2.6@3258.15,1220
NetC8_2: C8.2 C9.2 D2.2 G2.7 | length 429.6
  POWER w40: D2.2 3095,1056.06 C8.2 3107.99,1121.93 3150.43,1164.37 3275.2,1164.37 G2.7
NetC14_1: C14.1 R4.1 | length 130.6
  POWER w40: R4.1 969.23,1979.23 969.23,1850.77 C14.1
NetC18_1: C18.1 R30.2 T2.S1 | length 405.4
  SIGNAL/SGND w15: C18.1 6305.77,2397.3 6424.23,2397.3 R30.2 6664.09,2396.54 6687.55,2420 T2.S1
NetC18_2: C18.2 R27.1 R28.1 R29.1 R31.2 | length 402.3
  SIGNAL/SGND w15: R29.1 6108.07,2215 R28.1 6114.02,2217.09 R31.2 R27.1 C18.2
NetC19_1: C19.1 R20.1 R23.1 | length 640.1
  SIGNAL/SGND w15: C19.1 5915,2760 5810,2655 R20.1 5900,2480 6010,2480 6052.09,2437.91 R23.1
NetC20_1: C20.1 R12.1 | length 125.6
  POWER w40: R12.1 964.23,1689.23 964.23,1565.77 C20.1
NetD4_1: D4.1 G1.8 R5.1 | length 1529.2
  POWER w40: D4.1 1561.22,1704.02 1561.22,1656.22 1536.3,1631.3 1465.67,1631.3 1290,1455.63 1290,1160 1370.91,1079.09 1557.11,1079.09 1560,1081.99 G1.8@1583.15,1081.99
  POWER w60: R5.1 1510,1825 1562.87,1772.13 D4.1
NetD4_2: D4.2 Q1.1 R5.2 R8.1 | length 669.6
  POWER w40: Q1.1 1699.48,1826.39 1774.6,1826.39 R5.2 ; D4.2 1698.39,1707.32 1747.32,1707.32 1775,1735 1775,1740 1777.5,1742.5 1777.5,1775.64 1777.37,1775.77 1777.37,1823.61 R5.2 ; R8.1 1968.04,1810 1953.04,1825 R5.2
NetD5_1: D5.1 G2.8 R6.1 | length 1272.4
  POWER w40: G2.8 3367.05,1112.05 3460,1205 v1(3460,1395) ; v1(3462.84,1655) 3462.49,1655.36 3462.49,1718.97 D5.1 3567.8,1825 R6.1
  LOW POWER w32: v1@3461.42,1396.42 3461.42,1653.58 v1(3462.84,1655)
NetD5_2: D5.2 Q2.1 R6.2 R7.2 | length 582.4
  POWER w40: Q2.1 R6.2 3330,1721.06 D5.2 3328.27,1666.73 3395,1600 R7.2
NetD7_1: D7.1 G1.1 R10.1 | length 1092
  POWER w40: G1.1 1613.7,1432.05 1841.65,1660 R10.1 2353.54,1660 D7.1
NetD7_2: D7.2 Q3.1 R10.2 R18.1 | length 982.5
  POWER w40: Q3.1 2365.43,1781.97 D7.2 2848.71,1485.67 2853.04,1490 R18.1 2855.49,1490.49 2855.49,1659.51 R10.2
NetD8_1: D8.1 G2.1 R11.1 | length 1850.3
  POWER w40: G2.1 3492.42,1462.05 3589.47,1365 3785,1365 3845,1425 4352.8,1425 D8.1 4789.33,1724.33 R11.1
NetD8_2: D8.2 Q4.1 R11.2 R14.2 | length 1960.3
  POWER w40: R14.2 3110,1540 4030,1540 4269.02,1779.02 4269.02,1899.02 4316.56,1946.56 4366.56,1946.56 Q4.1 4518.27,1861.73 D8.2
NetR3_1: R3.1 R9.2 | length 123.3
  POWER w40: R3.1 R9.2
NetR9_1: R9.1 R19.2 | length 105
  POWER w40: R9.1 R19.2
NetR15_1: R15.1 R16.2 | length 65
  POWER w60: R16.2 R15.1
NetR21_1: R21.1 R22.2 | length 235.7
  SIGNAL/SGND w15: R21.1 6960.85,3614.15 6960.85,3380.85 R22.2
NetR22_1: R22.1 R23.2 R25.2 | length 1218.5
  SIGNAL/SGND w15: R23.2 5890,2365 5768.88,2486.12 5768.88,2784.74 5782.05,2797.91 R25.2 5795,3170 R22.1
NetR30_1: R30.1 T2.S2 | length 276.4
  SIGNAL/SGND w15: R30.1 6426.73,1961.73 6698.27,1961.73 T2.S2
PGND: C1.N C4.2 C5.2 C6.2 C7.N C10.2 C11.2 C12.2 C13.2 C14.2 C20.2 C21.2 C22.2 D6.2 D10.2 F1.2 G1.2 G1.15 G2.2 G2.15 P3.2 P4.2 Q3.3 Q4.3 Q5.2 Q5.4 R14.1 R17.1 R18.2 R19.1 R32.1 R33.1 T1.A T6.3 V1.1 W1.2
SD_FAULT: G1.13 G2.13 P6.1 R13.2 R32.2 R33.2 | length 4133.4
  LOW POWER w15: v1(2117.05,1282.05) v1(2342.95,1282.05) ; v1(4277.91,1327.09) v1@4487.09,1327.09
  SIGNAL/SGND w15: G1.13 v1(2117.05,1282.05) ; v1(2342.95,1282.05) 2345.89,1284.98 2722.07,1284.98 R32.2 3591.97,1287.91 3616.1,1312.05 3671.22,1312.05 3675.53,1316.36 3675.53,1318.3 3684.32,1327.09 R33.2 v1(4277.91,1327.09) ; v1(4490,1330) 4665,1330 5437.91,557.09 R13.2
SGND: D11.2 F1.1 P6.3 R13.1 R24.1 R28.2 R31.1 | length 4075.7
  SIGNAL/SGND w12: P6.3 5649.79,330.21 5674.79,330.21 5775,230
  SIGNAL/SGND w15: R13.1 5552.09,243.78 5640,331.69 P6.3 ; 5775,230 6065,230 6185,350 6185,460 6261.95,536.95 6261.95,1700.83 6237.36,1725.42 6210.08,1752.7 6210.08,1787.01 R24.1 6196.22,1787.09 6110,1873.31 R28.2 6115.98,2102.91 R31.1 6219.84,2098.07 D11.2
  SIGNAL/SGND w25: 5360.04,1025 5535,1025 5640,920 P6.3
  SIGNAL/SGND w32: F1.1 5145.04,1233.5 5151.48,1227.06 5157.98,1227.06 5360.04,1025
TEMP_FB: P6.2 T6.2 | length 3086.2
  SIGNAL/SGND w15: T6.2 5095,2865 5095,1815 4990,1710 4990,1145 5540,595 P6.2
VBUS_FB: P5.2 R16.1 R17.2 | length 1057.7
  SIGNAL/SGND w15: P5.2 125,2053.31 R16.1 R17.2 R17.2@418.78,1712.09
VOUT_FB: D11.3 P6.5 R20.2 R24.2 R26.2 | length 3789.1
  LOW POWER w15: v1(6215,1496.29) v1(6305,1496.29)
  SIGNAL/SGND w15: P6.5 5840,860 6130,1150 R26.2 R24.2@6203.17,1672.91 ; R24.2 R24.2@6203.17,1672.91 ; v1(6215,1496.29) 6190,1521.29 6190,1659.74 R24.2@6203.17,1672.91 ; v1(6305,1496.29) 6300,1501.29 6300,1786.41 6260,1826.41 D11.3 6780,1890 6815,1925 6815,2515 6760,2570 R20.2
pads on no net: G1.4 G1.5 G1.9 G1.10 G1.16 G2.4 G2.5 G2.9 G2.10 G2.16 H1.1 H1.2 H2.1 H2.2

## Polygon pours and split planes (outlines as drawn)
+380V on POWER "+380V_L01_P008" (solid, pour order 8): 25,5130 cw(c125,5130) 125,5230 3870,5230 cw(c3870,5130) 3970,5130 3970,3110 cw(c3870,3110) 3870,3010 3695,3010 ccw(c3695,2950) 3635,2950 3635,1985 cw(c3535,1985) 3535,1885 2940,1885 cw(c2940,1950) 2875,1950 2875,2265 ccw(c2775,2265) 2775,2365 1960,2365 ccw(c1960,2265) 1860,2265 1860,1980 cw(c1760,1980) 1760,1880 1540,1880 ccw(c1540,1780) 1440,1780 1440,130 cw(c1340,130) 1340,30 125,30 cw(c125,130) 25,130 25,360
AC_LINE on POWER "AC_LINE_L01_P012" (solid, pour order 12): 1905,2280 1905,1940 ccw(c2005,1940) 2005,1840 cw(c2005,1790) 2055,1790 2055,135 ccw(c2155,135) 2155,35 6975,35 ccw(c6975,135) 7075,135 7075,5145 ccw(c6975,5145) 6975,5245 5600,5245 ccw(c5600,5145) 5500,5145 5500,3130 ccw(c5600,3130) 5600,3030 6190,3030 cw(c6190,2930) 6290,2930 6290,1485 cw(c6190,1485) 6190,1385 4355,1385 ccw(c4355,1285) 4255,1285 4255,950 cw(c4155,950) 4155,850 2760,850 cw(c2760,950) 2660,950 2660,1370 cw(c2760,1370) 2760,1470 ccw(c2760,1515) 2805,1515 2805,2250 ccw(c2725,2250) 2725,2330 1955,2330 ccw(c1955,2280)
AC_NEUTRAL on POWER "AC_NEUTRAL_L01_P009" (solid, pour order 9): 3680,1550 ccw(c3780,1550) 3780,1450 6125,1450 ccw(c6125,1550) 6225,1550 6225,2935 ccw(c6185,2935) 6185,2975 5540,2975 cw(c5540,3075) 5440,3075 5440,5130 ccw(c5340,5130) 5340,5230 4125,5230 ccw(c4125,5130) 4025,5130 4025,3060 cw(c3950,3060) 3950,2985 3770,2985 ccw(c3770,2895) 3680,2895
+12 on LOW POWER "+12_L03_P015" (solid, pour order 15): 2700,1330 cw(c2800,1330) 2800,1430 3435,1430 cw(c3435,1330) 3535,1330 3535,955 cw(c3435,955) 3435,855 2800,855 cw(c2800,955) 2700,955
+5 on LOW POWER "+5_L03_P016" (solid, pour order 16): 3575,900 3575,1330 cw(c3675,1330) 3675,1430 4125,1430 cw(c4125,1330) 4225,1330 4225,935 cw(c4125,935) 4125,835 3640,835 cw(c3640,900)
+12 on LOW POWER "+12_L03_P019" (solid, pour order 19): 100,930 100,1185 cw(c200,1185) 200,1285 1175,1285 cw(c1175,1185) 1275,1185 1275,900 cw(c1215,900) 1215,840 190,840 cw(c190,930)
+5 on LOW POWER "+5_L03_P017" (solid, pour order 17): 1750,1105 cw(c1850,1105) 1850,1205 2075,1205 cw(c2075,1105) 2175,1105 2175,730 cw(c2075,730) 2075,630 1850,630 cw(c1850,730) 1750,730
PGND on PGND "PGND_L02_P013" (solid, pour order 13): 25,5130 cw(c125,5130) 125,5230 5100,5230 cw(c5100,5130) 5200,5130 5200,130 cw(c5100,130) 5100,30 125,30 cw(c125,130) 25,130 25,4080

## Silkscreen, mask and mechanical layers (free items; w line width, h text height)
Top Overlay:
  text "DESIGNED BY AFRAAZ KHAN" at 495,70 h60